# Altium PCB MIFA.PcbDoc (part 3 of 5)
Units mm, origin at the board's own origin, x right, y up, seen from the top; angles counter-clockwise.
Board outline 61 x 65 mm, 6 copper layers (Top Layer, Mid-Layer 1, Mid-Layer 2, Mid-Layer 3, Mid-Layer 4, Bottom Layer), stack 1.538 mm thick; 269 components, 171 nets, 1183 pads, 797 vias.
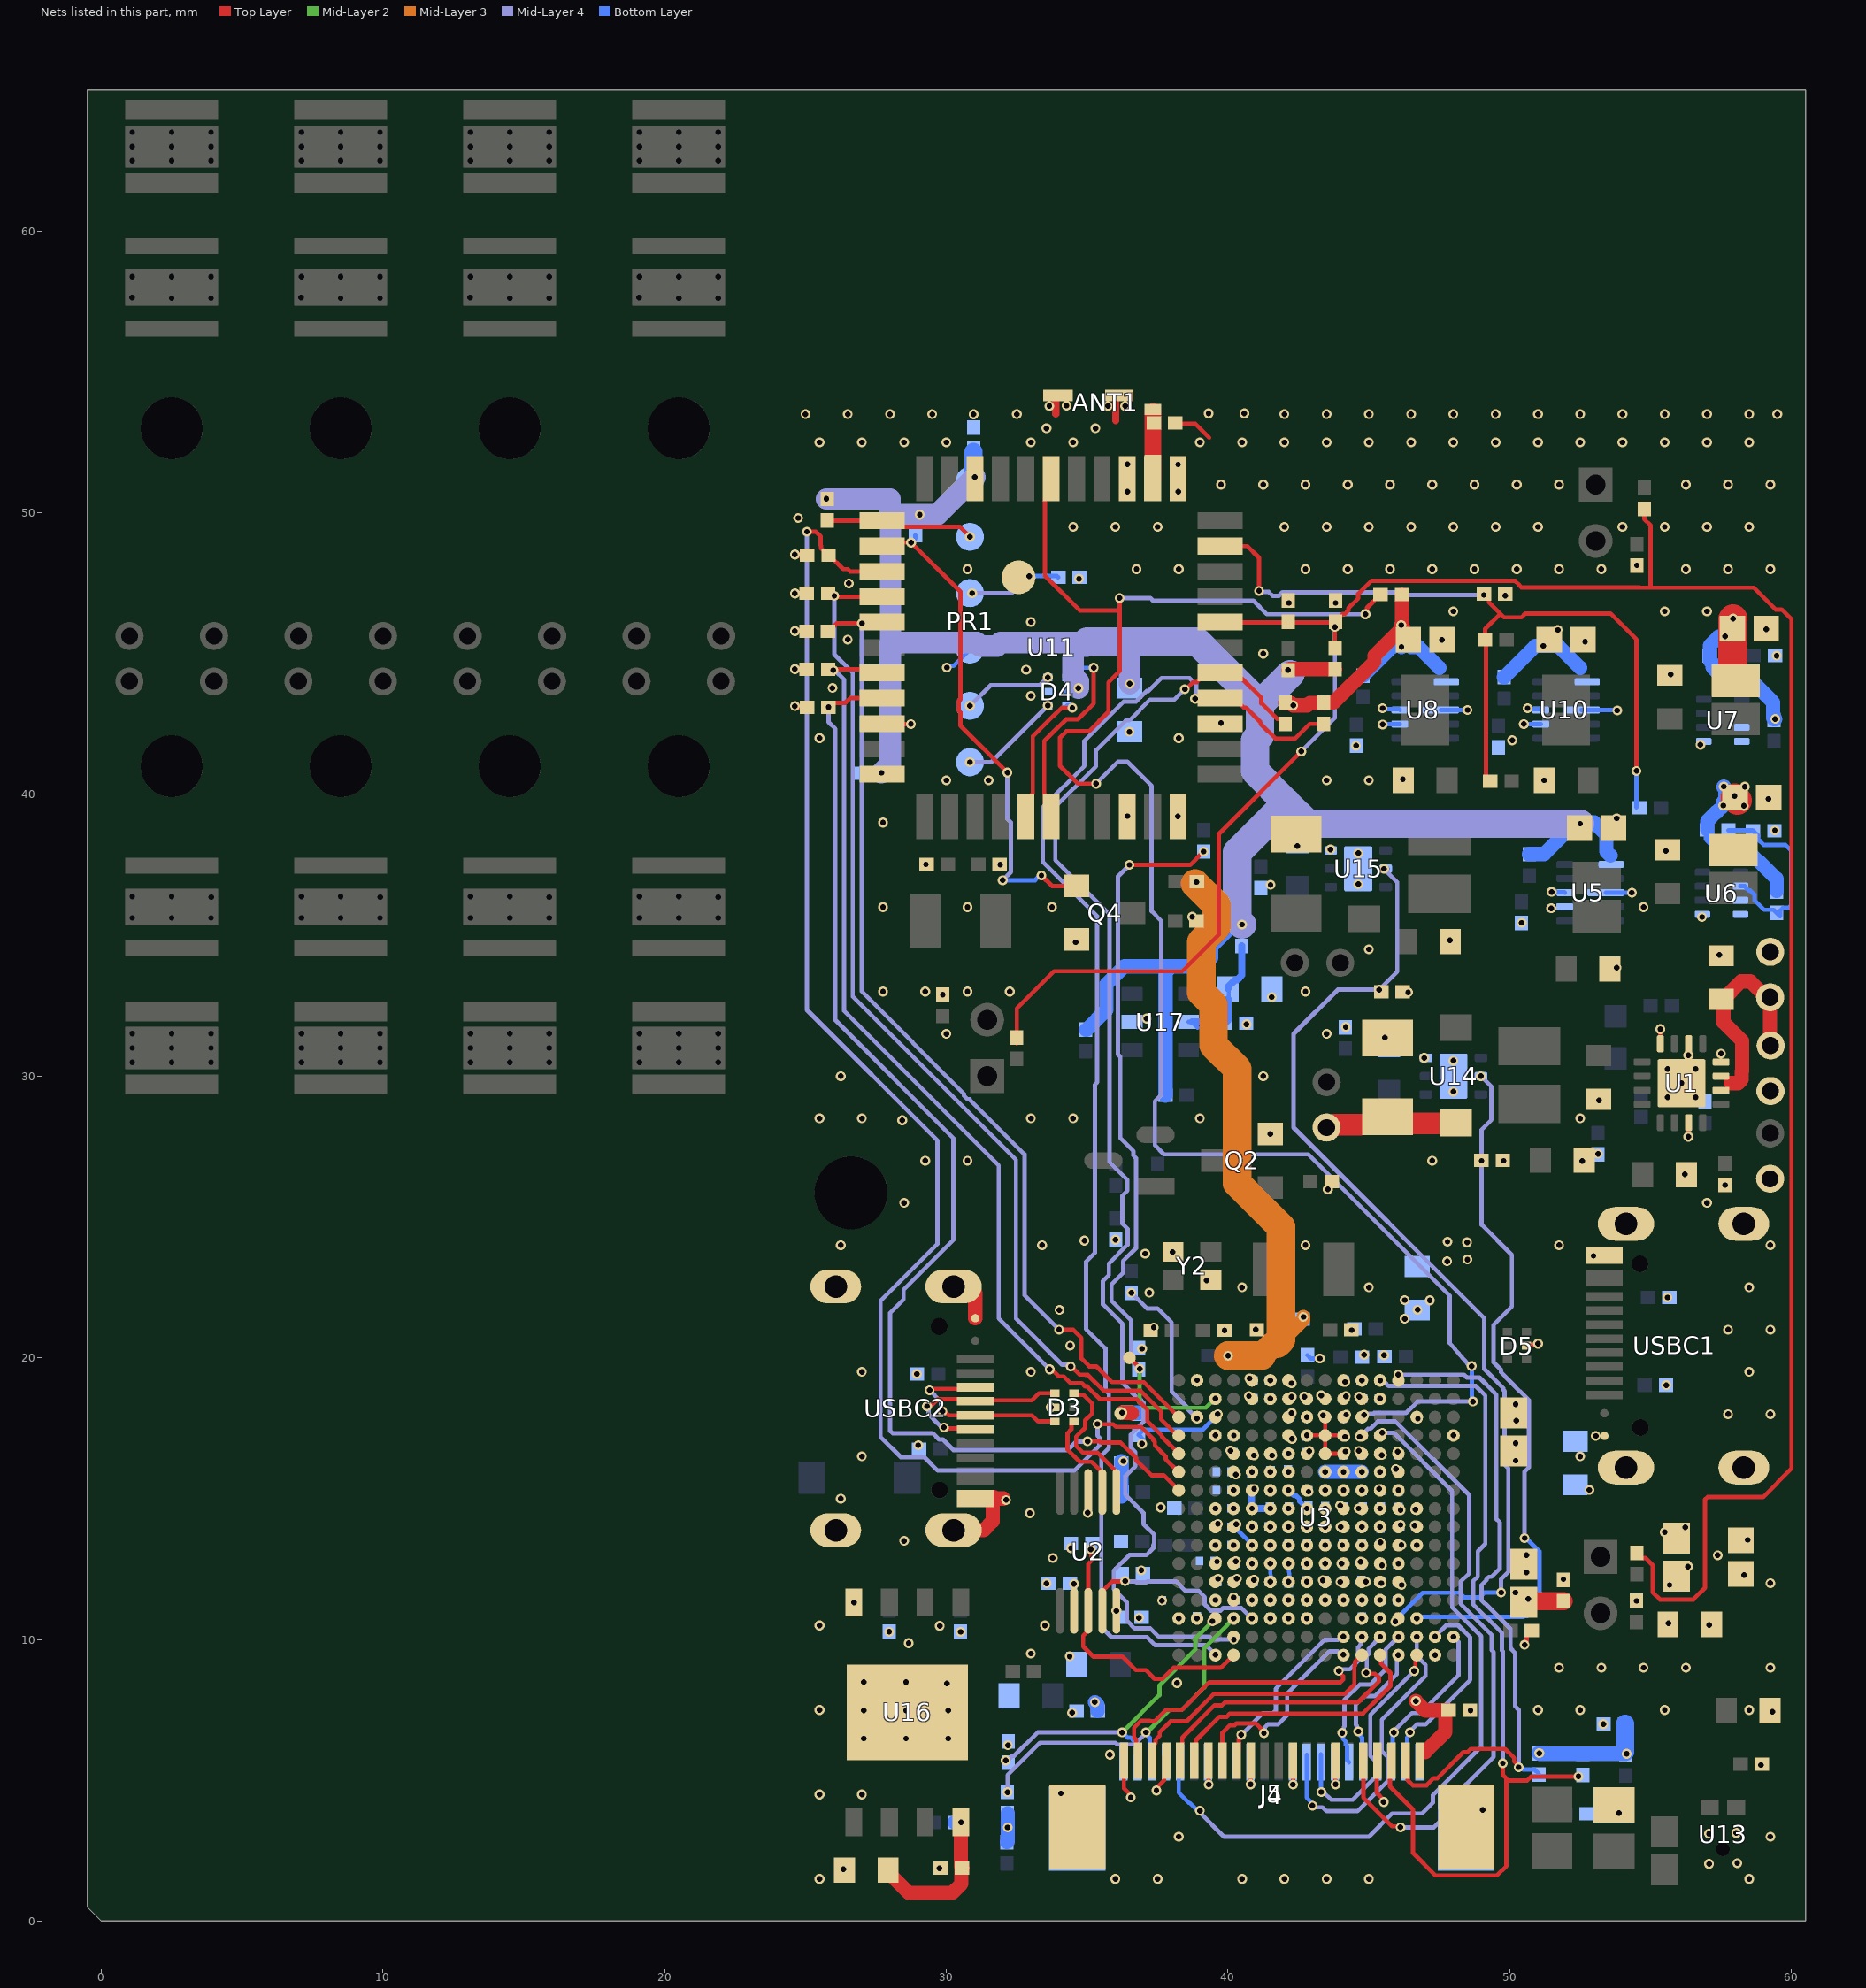
[diagram p6: the nets of this part, all layers, seen from the top]

## Part data (continued)
R22 R50: library part CMP-03412-016018-1, "C49655223", Case/Package=0402, Max Operating Temperature=155°C, Max Power Dissipation=63mW, Min Operating Temperature=-55°C, Ratings=AEC-Q200, Resistance=511kOhm, Resistor Type="Thick Film", Temperature Coefficient=100ppm/°C, Tolerance=1%, Features="Moisture Resistant", Height=0.015inch, Length=0.039inch, Number of Terminations=2, Packaging="Tape and Reel", RoHS Compliant=Yes, Series=AC, Width=0.02inch
R24 R55: library part CMP-03412-016018-1, "C54920709", Case/Package=0402, Max Operating Temperature=155°C, Max Power Dissipation=63mW, Min Operating Temperature=-55°C, Ratings=AEC-Q200, Resistance=91kOhm, Resistor Type="Thick Film", Temperature Coefficient=100ppm/°C, Tolerance=1%, Features="Moisture Resistant", Height=0.015inch, Length=0.039inch, Number of Terminations=2, Packaging="Tape and Reel", RoHS Compliant=Yes, Series=AC, Width=0.02inch
R25: library part CMP-03412-016018-1, "C25779", Case/Package=0402, Max Operating Temperature=155°C, Max Power Dissipation=63mW, Min Operating Temperature=-55°C, Ratings=AEC-Q200, Resistance=33kOhm, Resistor Type="Thick Film", Temperature Coefficient=100ppm/°C, Tolerance=1%, Features="Moisture Resistant", Height=0.015inch, Length=0.039inch, Number of Terminations=2, Packaging="Tape and Reel", RoHS Compliant=Yes, Series=AC, Width=0.02inch
R29: library part CMP-03412-016018-1, "C25750", Case/Package=0402, Max Operating Temperature=155°C, Max Power Dissipation=63mW, Min Operating Temperature=-55°C, Ratings=AEC-Q200, Resistance=120kOhm, Resistor Type="Thick Film", Temperature Coefficient=100ppm/°C, Tolerance=1%, Features="Moisture Resistant", Height=0.015inch, Length=0.039inch, Number of Terminations=2, Packaging="Tape and Reel", RoHS Compliant=Yes, Series=AC, Width=0.02inch
R33 R46 R47 R48 R52: library part CMP-03412-016018-1, "C324768", Case/Package=0402, Max Operating Temperature=155°C, Max Power Dissipation=63mW, Min Operating Temperature=-55°C, Ratings=AEC-Q200, Resistance=240Ohm, Resistor Type="Thick Film", Temperature Coefficient=100ppm/°C, Tolerance=1%, Features="Moisture Resistant", Height=0.015inch, Length=0.039inch, Number of Terminations=2, Packaging="Tape and Reel", RoHS Compliant=Yes, Series=AC, Width=0.02inch
R37 R62: library part CMP-03412-016018-1, "C25087", Case/Package=0402, Max Operating Temperature=155°C, Max Power Dissipation=63mW, Min Operating Temperature=-55°C, Ratings=AEC-Q200, Resistance=200Ohm, Resistor Type="Thick Film", Temperature Coefficient=100ppm/°C, Tolerance=1%, Features="Moisture Resistant", Height=0.015inch, Length=0.039inch, Number of Terminations=2, Packaging="Tape and Reel", RoHS Compliant=Yes, Series=AC, Width=0.02inch
R42 R54: library part CMP-03412-016018-1, "C25092", Case/Package=0402, Max Operating Temperature=155°C, Max Power Dissipation=63mW, Min Operating Temperature=-55°C, Ratings=AEC-Q200, Resistance=22Ohm, Resistor Type="Thick Film", Temperature Coefficient=100ppm/°C, Tolerance=1%, Features="Moisture Resistant", Height=0.015inch, Length=0.039inch, Number of Terminations=2, Packaging="Tape and Reel", RoHS Compliant=Yes, Series=AC, Width=0.02inch
R56: library part CMP-03412-016018-1, "C25794", Case/Package=0402, Max Operating Temperature=155°C, Max Power Dissipation=63mW, Min Operating Temperature=-55°C, Ratings=AEC-Q200, Resistance=51kOhm, Resistor Type="Thick Film", Temperature Coefficient=100ppm/°C, Tolerance=1%, Features="Moisture Resistant", Height=0.015inch, Length=0.039inch, Number of Terminations=2, Packaging="Tape and Reel", RoHS Compliant=Yes, Series=AC, Width=0.02inch
R59: library part CMP-03412-016018-1, "C25764", Case/Package=0402, Max Operating Temperature=155°C, Max Power Dissipation=63mW, Min Operating Temperature=-55°C, Ratings=AEC-Q200, Resistance=200kOhm, Resistor Type="Thick Film", Temperature Coefficient=100ppm/°C, Tolerance=1%, Features="Moisture Resistant", Height=0.015inch, Length=0.039inch, Number of Terminations=2, Packaging="Tape and Reel", RoHS Compliant=Yes, Series=AC, Width=0.02inch
R63: library part CMP-03412-016018-1, "C49653548", Case/Package=0402, Max Operating Temperature=155°C, Max Power Dissipation=63mW, Min Operating Temperature=-55°C, Ratings=AEC-Q200, Resistance=30kOhm, Resistor Type="Thick Film", Temperature Coefficient=100ppm/°C, Tolerance=1%, Features="Moisture Resistant", Height=0.015inch, Length=0.039inch, Number of Terminations=2, Packaging="Tape and Reel", RoHS Compliant=Yes, Series=AC, Width=0.02inch
R66: library part CMP-03412-016018-1, "C23157", Manufacturer=Yageo, Manufacturer Part Number=SR0603FR-7T10RL, Package=SR0603, Power Rating=0.25W, Resistance=3Ohm, Temperature="-55°C to +155°C", Temperature Range High=+155°C, Temperature Range Low=-55°C, Tolerance=0.01, Voltage Rating=75V, Automotive=Yes, Automotive Grade="Grade 0", Category=Res, ComponentLink2Description=Datasheet, ComponentLink2URL=http://www.yageo.com/documents/recent/PYu-SR_D_F%20tol_RoHS_L_3.pdf, Composition="Thick Film", Device Class L1="Passive Components", Device Class L2=Resistors, Device Class L3="Chip SMD Resistors", Digikey Description="RES SMD 0603 1/10W 1% 3 OHM", Footprint Url=http://www.yageo.com/exep/pages/download/literatures/PYu-R_Mount_10.pdf, Height=0.55mm, Ipc Land Pattern Name=RESC16080X45, Lead Free=Yes, Octopart=https://octopart.com/sr0603fr-7t10rl-yageo-91478074, RoHS=TRUE, Series=SR
R68: library part CMP-03412-016018-1, "C22769", Manufacturer=Yageo, Manufacturer Part Number=SR0603FR-7T10RL, Package=SR0603, Power Rating=0.25W, Resistance=1.5Ohm, Temperature="-55°C to +155°C", Temperature Range High=+155°C, Temperature Range Low=-55°C, Tolerance=0.01, Voltage Rating=75V, Automotive=Yes, Automotive Grade="Grade 0", Category=Res, ComponentLink2Description=Datasheet, ComponentLink2URL=http://www.yageo.com/documents/recent/PYu-SR_D_F%20tol_RoHS_L_3.pdf, Composition="Thick Film", Device Class L1="Passive Components", Device Class L2=Resistors, Device Class L3="Chip SMD Resistors", Digikey Description="RES SMD 0603 1/10W 1% 1.5 OHM", Footprint Url=http://www.yageo.com/exep/pages/download/literatures/PYu-R_Mount_10.pdf, Height=0.55mm, Ipc Land Pattern Name=RESC16080X45, Lead Free=Yes, Octopart=https://octopart.com/sr0603fr-7t10rl-yageo-91478074, RoHS=TRUE, Series=SR
R69: library part CMP-03412-016018-1, "C25765", Case/Package=0402, Max Operating Temperature=155°C, Max Power Dissipation=63mW, Min Operating Temperature=-55°C, Ratings=AEC-Q200, Resistance=20kOhm, Resistor Type="Thick Film", Temperature Coefficient=100ppm/°C, Tolerance=1%, Features="Moisture Resistant", Height=0.015inch, Length=0.039inch, Number of Terminations=2, Packaging="Tape and Reel", RoHS Compliant=Yes, Series=AC, Width=0.02inch
R71 R72: library part CMP-03412-016018-1, "C26083", Case/Package=0402, Max Operating Temperature=155°C, Max Power Dissipation=63mW, Min Operating Temperature=-55°C, Ratings=AEC-Q200, Resistance=1MOhm, Resistor Type="Thick Film", Temperature Coefficient=100ppm/°C, Tolerance=1%, Features="Moisture Resistant", Height=0.015inch, Length=0.039inch, Number of Terminations=2, Packaging="Tape and Reel", RoHS Compliant=Yes, Series=AC, Width=0.02inch
RBT1: library part CMP-03412-016018-1, "C25744", Case/Package=0402, Max Operating Temperature=155°C, Max Power Dissipation=63mW, Min Operating Temperature=-55°C, Ratings=AEC-Q200, Resistance=768kR, Resistor Type="Thick Film", Temperature Coefficient=100ppm/°C, Tolerance=1%, Features="Moisture Resistant", Height=0.015inch, Length=0.039inch, Number of Terminations=2, Packaging="Tape and Reel", RoHS Compliant=Yes, Series=AC, Width=0.02inch
S1 S2 S3: library part CMP-1755-00004-1, "C157932", Capacitance="10 uF", Case\Package=Radial, Max Operating Temperature="85 degC", Min Operating Temperature="-40 degC", Package Quantity=200, Tolerance=20%, Voltage Rating="50 V", ComponentLink1Description=Datasheet, ComponentLink1URL=http://www.jst-mfg.com/product/pdf/eng/ePH.pdf, DatasheetVersion=Dec-12, Diameter="5 mm", Height="11 mm", Lead Pitch="2 mm", Length="11 mm", Mount="Through Hole", PackageDescription="Male Header, Pitch 2 mm, 1 x 2 Position, Height 4.8 mm, Tail Length 3.4 mm", PackageReference=S2B-PH-K-S, Packaging=Bulk, Pins=2, Radiation Hardening=No, REACH SVHC="No SVHC", RoHSCompliant=true, Voltage Rating (DC)="50 V"
U1: library part CMP-0321-00268-2, "C129319", Manufacturer="Texas Instruments", Over Voltage Protection=N, Code_JEDEC=MO-220, ComponentLink1Description=Datasheet, ComponentLink1URL=http://www.ti.com/general/docs/lit/getliterature.tsp?genericPartNumber=BQ24072T&fileType=pdf, DatasheetVersion=SLUS937A, Eco-Plan="Green (RoHS & no Sb/Br)", Lead Acid=N, Li-Ion=Y, Li-Polymer=Y, Mounting Technology="Surface Mount", NiCd=N, NiMH=N, PackageDescription="16-Pin Plastic Quad Flat No-Lead, 3 x 3 mm Body, 0.5 mm Pitch, 1.7 x 1.7 mm Exposed Pad", PackageReference=RGT0016C, PackageVersion="revH, Oct-2011", PartNumber=BQ24072TRGTR, SubFamily="Battery Charge Management", Vin(Min)(V)=4.3
U2: "C3035748", Current - Supply=-, JLCPCB Part Class="Extended Part", LCSC Part Name=CH340X, Manufacturer=WCH(南京沁恒), Operating Temperature=-20℃~+70℃, Voltage - Supply=3.3V；5V, AddInBom=yes, Applications Function="USB to serial；USB to Parallel", ConvertToPcb=yes, Data Rate=2Mbps, Datasheet=https://item.szlcsc.com/datasheet/CH340X/3584030.html, FootprintName=MSOP-10_L3.0-W3.0-P0.50-LS5.0-BL, Manufacturer Part=CH340X, ModelId=875cf331c88d40d1aea94374997f39b1, ModelName=MSOP-10_L3.0-W3.0-H1.1-LS5.0-P0.50, ModelTransform=118.11,196.85,0,0,0,0,0,0,0, Number Of Channels=-, Quiescent Supply Current=-, Supplier=LCSC, Supplier Footprint=MSOP-10, Supplier Part=C3035748, Symbol=CH340X, USB Protocol="USB 2.0"
U3: "C42414902", JLCPCB Part Class="Extended Part", LCSC Part Name=K230平台及其特性, Manufacturer=Canaan(嘉楠), ManufacturerPart=K230D, AddInBom=yes, ConvertToPcb=yes, Datasheet=https://item.szlcsc.com/datasheet/K230D/44408979.html, Features="Calendar function；Power-on reset (POR)；True random number generator (TRNG)；Watchdog reset；Built-in general-purpose timer；Hardware CRC；Software reset", FootprintName=BGA-256_L11.0-W11.0-P0.65-BL, ModelId=5e2811f3a7254058be5ff42f0a018083, ModelName=BGA-256_L11.0-W11.0-P0.65-BL, ModelTransform=433.07,433.07,0,90,0,0,0,0,0, Supplier=LCSC, Supplier Footprint=BGA-256, SupplierPart=C42414902, Symbol=K230D
U5 U8 U10: library part CMP-04918-000005-1, "C2845237", Manufacturer="Texas Instruments", Max Junction Temp=+125°C, Max Supply Voltage=5.5V, Min Supply Voltage=1.3V, Nominal Supply Current=11uA, Output Current=2A, Output Voltage=1.8-5.2V, Package=DLA0010A, Switching Frequency=1.4/1.6/2.1MHz, Temperature="-40°C to +125°C", Temperature Range Low=-40°C, Automotive=No, Category=IC, ComponentLink2Description=Datasheet, ComponentLink2URL=https://www.ti.com/lit/ds/symlink/tps63802.pdf, Device Class L1="Integrated Circuits (ICs)", Device Class L2="Power Management ICs", Device Class L3="Voltage Regulators - Switching", Digikey Description="IC POWER MANAGEMENT", Height=1mm, Lead Free=Yes, Manufacturer Part Number=TPS63802DLAR, Max Duty Cycle=100%, Mouser Description="2-A, high-efficient, 11-µA quiescent current buck-boost converter in QFN/DFN package 10-VSON-HR -40 to 125", Number Of Outputs=1, Octopart=https://octopart.com/tps63802dlar-texas+instruments-97359678, Output Type=AdjustableProgrammable, RoHS=TRUE, Standoff Height=0mm, Switching Topology=Buck-Boost, Temperature Range High=+125°C
U6 U7: library part CMP-04918-000715-1, "C2693497", Max Input Voltage=5.5V, Max Operating Temperature=125°C, Max Output Voltage=4V, Min Input Voltage=2.4V, Min Operating Temperature=-40°C, Min Output Voltage=600mV, Output Current=3A, Switching Frequency=2.2MHz, Mount="Surface Mount", Number Of Outputs=1, Number of Pins=8, Output Configuration=Positive, Output Type=Adjustable, Packaging="Cut Tape", RoHS Compliant=Yes, Series=-, Synchronous Rectifier=Yes
U11: "C41368035", JLCPCB Part Class="Extended Part", LCSC Part Name=Wi-Fi6+BLE5.3模组, Manufacturer=Ai-Thinker(安信可), ManufacturerPart=Ai-M62-CBS(BLIFN4), Operating Temperature=-40℃~+85℃, Output Power=22dBm, Receive  Current=59mA, Send  Current=394mA, Voltage - Supply=2.97V~3.6V, AddInBom=yes, ConvertToPcb=yes, Datasheet=https://item.szlcsc.com/datasheet/Ai-M62-CBS(BLIFN4)/43122706.html, FootprintName=WIRELM-SMD_AI-M62-CBS, Interface Type=I2C；GPIO；UART；USB2.0；SPI；PWM；SDIO；I2S, ModelId=220c4423d0fa4477abd1b31893269491, ModelName=WIRELM-SMD_AI-M62-CBS, ModelTransform=472.44,472.44,0,0,0,0,0.001,0.005,0, Sensitivity=-98dBm, Supplier=LCSC, Supplier Footprint=SMD,12x12mm, SupplierPart=C41368035, SymbolName=AI-M62-CBS(BLIFN4), Utilized IC / Part=BL616
U13: "C51928208", Current Consumption=175uA, JLCPCB Part Class="Extended Part", LCSC Part Name="3.6V -38dB", Manufacturer=MEMS(敏芯微), ManufacturerPart=MSM381ACB026, Voltage - Supply=3.6V, AddInBom=yes, ConvertToPcb=yes, Datasheet=https://item.szlcsc.com/datasheet/MSM381ACB026/54640763.html, Direction=Omnidirectional, Features="Omnidirectional pickup", FootprintName=MIC-SMD_L2.8-W1.9_MSM381ACB026, Height=0.9mm, Impedance=170Ω, Length=2.75mm, Output Type="Analog output", S/N Ratio=64dB, Sensitivity=-38dB, Supplier=LCSC, Supplier Footprint=LGA-3(1.9x2.8), SupplierPart=C51928208, Symbol=MSM381ACB026, Width=1.85mm
U14 U15: library part TI-TPS6116XDRV6-1600X1000TP, "C324075", Manufacturer="Texas Instruments", Rating=Catalog, Switching Frequency(Max)(kHz)=600, ComponentLink1Description="Manufacturer URL", ComponentLink1URL=http://www.ti.com/, ComponentLink2Description=Datasheet, ComponentLink2URL=http://www.ti.com/general/docs/lit/getliterature.tsp?genericPartNumber=TPS61160A&fileType=pdf, ComponentLink3Description="Package Specification", ComponentLink3URL=http://www.ti.com/litv/pdf/mpds216d, DatasheetVersion=SLVS937A, Dimming=TRUE, Eco-Plan="Green (RoHS & no Sb/Br)", Iq(Typ)(mA)=1.5, Mounting Technology="Surface Mount", PackageDescription="6-Pin Plastic Small Outline No-Lead, Body 2 x 2 mm, Pitch 0.65 mm", PackageReference=DRV0006A, PackageVersion=4206925/E, PartNumber=TPS61161DRVR, SubFamily="White LED Driver", Synchronous Rectification=TRUE, Topology=Boost, Vin(Max)(V)=18, Vin(Min)(V)=2.7
U16: "C17626844", Clock Frequency=104MHz, JLCPCB Part Class="Extended Part", LCSC Part Name="支持双路/四路SPI、缓冲读取和顺序读取的SPI NAND闪存", Manufacturer=Winbond(华邦), ManufacturerPart=W25N02KVZEIR, Operating Temperature=-40℃~+85℃, Standby Supply Current=10uA, Voltage - Supply=2.7V~3.6V, AddInBom=yes, Block Erase Time(tBE)=2ms, ConvertToPcb=yes, Data Retention - TDR (Year)="10 Years", Datasheet=https://item.szlcsc.com/datasheet/W25N02KVZEIR/3508597.html, FootprintName=WSON-8_L8.0-W6.0-P1.27-TL-EP-1, Interface=SPI, Memory Size=2Gbit, ModelId=9e5cc5bccb2d4d2ba04b587249e4c285, ModelName=WSON-8_L8.0-W6.0-P1.27-TL-EP-1, ModelTransform=314.96,236.22,0,0,0,0,0,0,0, Page Program time (TPP)=700us, Program / Erase Cycles="60,000 Cycles", Supplier=LCSC, Supplier Footprint=WSON-8-EP(6x8), SupplierPart=C3010298, Symbol=W25N02KVZEIR, Write Cycle Time(tWC)=-
U17: library part aht30_c45354925, "C2757850", Current - Supply=570uA, Humidity Tolerance=±3%RH, JLCPCB Part Class="Extended Part", LCSC Part Name=温湿度传感器, Manufacturer=广州奥松, ManufacturerPart=AHT30, Temperature Range=-40℃~+120℃, Temperature Tolerance=±0.5℃, Voltage - Supply=2.2V~5.5V, AddInBom=yes, ConvertToPcb=yes, Datasheet=https://item.szlcsc.com/datasheet/AHT30/47444209.html, Features="Factory calibration", FootprintName=MIC-SMD_6P-L3.0-W3.0-P1.00-TL, Humidity=0%RH~100%RH, Interface=I2C, ModelId=157746d41b2d4f19849b880ea67ac3ea, ModelName=MIC-SMD_6P-L3.0-W3.0-P1.00-TL, ModelTransform=118.11,118.11,0,0,0,0,0.006,-0.001,0, Resolution=-, Supplier=LCSC, Supplier Footprint=SMD-6P,3x3mm, SupplierPart=C45354925, Symbol=AHT30_C45354925
USBC1 USBC2: "C165948", Current Rating-Power=5A, JLCPCB Part Class="Extended Part", LCSC Part Name="Type-C 母 卧贴", Manufacturer=韩国韩荣, ManufacturerPart=TYPE-C-31-M-12, Operating Temperature=-30℃~+80℃, Voltage Rating=20V, AddInBom=yes, Connect-Disconnect Life="10,000 cycles", Connector Type=Type-C, ConvertToPcb=yes, Datasheet=https://item.szlcsc.com/datasheet/TYPE-C-31-M-12/177331.html, FootprintName=USB-C_SMD-TYPE-C-31-M-12_1, Gender=Female, Length=7.35mm, ModelId=8421221a464047838322348b3a9debc3, ModelName=USB-C_SMD-TYPE-C-31-M-12_1, ModelTransform=351.9678,311.023,0,180,0,0,0,-43.307,-33.465, Mounting Type="Surface Mount, Right Angle", Number of Contacts=16P, Number of Ports=1, Protocol Standard=-, Supplier=LCSC, Supplier Footprint=SMD, SupplierPart=C165948, Symbol=TYPE-C-31-M-12
Y1 Y3: library part CMP-0447-00001-4, "C32346", Case/Package=CSMD, ESR (Equivalent Series Resistance)=70kR, Frequency=32.768kHz, Frequency Tolerance=20ppm, Load Capacitance=12.5pF, Max Operating Temperature=85°C, Min Operating Temperature=-40°C, Operating Frequency="32.768 kHz", Package Quantity=3000, Depth=1.5mm, Height=0.9mm, Lead Free="Lead Free", Length=3.2mm, Number of Pins=2, Packaging="Tape and Reel", Radiation Hardening=No, REACH SVHC="No SVHC", RoHS Compliant=Yes, Series=ABS07, Series Resistance=70kR, Termination=SMD/SMT, Tolerance=20ppm, Width=1.5mm
Y2: library part CMP-06054-000017-1, "C2965580", Case/Package=SMD/SMT, ESR (Equivalent Series Resistance)=150R, Frequency=24MHz, Frequency Stability=40ppm, Frequency Tolerance=30ppm, Load Capacitance=6pF, Max Operating Temperature=85°C, Min Operating Temperature=-30°C, Operating Frequency="24 MHz", Package Quantity=1, Depth=1.6mm, Height=0.028inch, Lead Free="Lead Free", Length=2mm, Mount="Surface Mount", Number of Pins=4, Packaging="Tape and Reel", REACH SVHC="No SVHC", RoHS Compliant=Yes, Series=XRCGB, Series Resistance=150R, Termination=SMD/SMT, Tolerance=30ppm, Width=1.6mm

## Free pads (board coordinates)
  rect 0.599x1.6 smd mask+0.05: GND1(37.331,51.255)
  round 2.2 hole 2.2 unplated: HOLE(2.5,41) HOLE(2.5,53) HOLE(8.5,41) HOLE(8.5,53) HOLE(14.5,41) HOLE(14.5,53) HOLE(20.5,41) HOLE(20.5,53)
  round 2.6 hole 2.6 unplated: HOLE(26.615,25.858)

## Via types
v1: diameter 0.35, hole 0.2, Top Layer to Bottom Layer, tented both sides, 788 vias
v2: diameter 0.35, hole 0.2, Top Layer to Bottom Layer, 9 vias

## Nets (pads, with @x,y where several pads share a name; then routed paths per layer and width w, separated by ;. In a path a pad name is that pad's centre, name@x,y a point inside that pad or via, vN(x,y) a via of type N, cw(c..) or ccw(c..) an arc to the next point about the centre after c; other vN are vias at no path point)
0V8: C17.1 C18.1 C21.1 C38.1 C58.1 C63.1 C65.1 C66.1 C67.1 C68.1 C69.1 C70.1 C71.1 C72.1 C73.1 C74.1 C75.1 C76.1 C77.1 C78.1 C79.1 C80.1 C81.1 C82.1 C84.1 C85.1 FB3.1 L1.2 R25.2 U3.D8 U3.E6 U3.E7 U3.E9 U3.E10 U3.F5 U3.F6 U3.F7 U3.F9 U3.G5 U3.G6 U3.G7 U3.G9 U3.H6 U3.H8 U3.H10 U3.J6 U3.J8 U3.J10 U3.K6 U3.K8 U3.K10 U3.L6 U3.L8 U3.L10 U3.M8 U3.M10 | length 9.7
  Top Layer w1.016: C18.1@57.985,39.887 C18.1@58.084,39.789
  Bottom Layer w0.152: C82.1@40.104,14.004 40.157,14.057 40.254,14.057 v1(40.292,14.095) 40.33,14.057 40.33,13.895 40.856,13.369 v1@40.868,13.369 ; v1@41.502,12.548 C63.1@41.516,12.073 ; v1(42.148,12.7) v1@42.159,12.697 ; v1@42.159,12.7 v1@42.159,12.697 ; C67.1@42.178,12.05 v1@42.159,12.697 ; v1@42.232,12.683 v1@42.159,12.697 ; C66.1@42.706,12.697 C66.1@42.778,12.699
  Bottom Layer w0.254: v1(40.929,15.348) 40.91,15.367 C65.1@40.826,15.367 40.838,15.355 40.838,14.662 v1(40.85,14.65) v1(41.5,14.65)
  Bottom Layer w0.381: R25.2@57.004,38.736 57.026,38.736 57.071,38.69 57.071,38.45 57.473,38.049 57.976,38.049
  Bottom Layer w0.508: R25.2@57.008,38.754 57.008,39.048 57.336,39.376 57.352,39.376 v1(57.58,39.604) 57.58,39.734 57.66,39.814 57.66,40.192 57.599,40.253 v1(57.599,40.28) ; 57.976,38.049 58.17,38.049 58.192,38.027 58.407,38.027 58.711,37.723 58.85,37.625 59.471,37.004 C21.1@59.471,36.575
  other v1: 41.5,12.049 42.148,12.049 44.024,12.695 40.85,12.7 41.5,12.7 42.798,12.7 43.448,12.7 44.706,12.759 40.85,13.35 41.5,13.35 42.148,13.35 58.44,13.536 55.502,13.813 56.229,13.979 42.798,14 43.448,14 44,14 44.749,14 45.399,14 42.148,14.65 42.858,15.247 43.448,15.3 44.098,15.3 44.749,15.3 52.828,15.312 45.368,15.346 58.311,39.595 57.981,39.949 58.345,40.275
0V8_MIPI: C28.1 C31.1 C41.1 FB3.2 U3.M4 U3.N5
  other v1: 55.63,10.576 45.399,11.399 46.161,11.934 55.672,11.933 56.328,12.592
1V1: C20.1 C22.1 C39.1 C40.1 C42.1 C45.1 C46.1 C47.1 C48.1 C49.1 C59.1 L2.2 R26.2 R33.1 R47.2 U3.F11 U3.F15 U3.F16 U3.G11 U3.J11 U3.K11 U3.L11 U3.L16 U3.M15 | length 9
  Top Layer w1.016: L2.2@57.907,44.1 57.907,46.218 v1(57.928,46.239)
  Bottom Layer w0.508: v1(43.448,15.951) v1(44.098,15.951) v1(44.749,15.951) ; R26.2@57.098,44.918 57.098,45.283 57.41,45.595 57.631,45.595 v1(57.648,45.612) 57.648,45.629 57.928,45.91 v1(57.928,46.239) ; R26.2@57.098,44.92 57.098,44.906 57.102,44.902 57.102,44.757 57.194,44.665 57.194,44.517 57.549,44.161 58.454,44.161 59.348,43.267 59.348,42.715 59.384,42.678 v1(59.425,42.678)
  other v1: 41.5,15.951 42.148,15.951 41.5,18.549 45.399,18.549 41.5,19.199 44.749,19.199 44.828,20.107 45.535,20.095 46.27,21.384 46.727,21.707 47.162,22.04 46.27,22.046
1V8: B1_P.1 C12.1 C13.1 C44.1 C53.1 C54.1 C55.1 C56.1 C57.1 C89.1 FB1.1 FB2.1 R6.2 R20.1 R30.1 R45.2 R53.2 R56.2 R64.2 RD1.1 U3.C6 U3.D4 U3.D5 U3.D10 U3.D11 U3.D12 U3.E8 U3.H14 U10.6 | length 28.3
  Top Layer w0.508: v1(36.244,18.049) 36.564,18.049 36.583,18.03
  Top Layer w0.65: FB1.1@50.458,11.358 50.568,11.358 v1(50.653,11.443) FB1.1@50.653,11.359 ; FB1.1@50.654,11.358 RD1.1@51.907,11.358
  Mid-Layer 3 w0.508: 41.879,20.681 41.989,20.681 42.674,21.366 v1(42.674,21.452)
  Mid-Layer 3 w0.9: 41.185,20.075 41.61,20.5
  Mid-Layer 3 w1.016: v1@38.831,36.837 39.588,36.08 39.588,35.301 39.05,34.763 39.05,32.972 39.481,32.541 39.481,31.1 40.325,30.255 40.325,26.196 41.879,24.642 41.879,20.681 ; v1(40,20.075) 41.185,20.075 ; 41.738,20.5 41.879,20.641
  Bottom Layer w0.508: R53.2@36.219,15.084 R53.2@36.219,15.231 R20.1@36.219,16.332 ; v1(36.244,18.049) R64.2@36.831,18.049 ; R56.2@49.788,44.166 49.802,44.166 50.909,45.273 v1(51.189,45.273) 51.727,45.273 52.5,44.5
  other v1: 40.2,11.496 50.196,11.67 40.311,12.158 39.609,12.768 40.85,14 40.2,15.3 40.274,15.856 36.282,16.332 40.088,16.707 50.236,17.77 42.798,17.899 50.208,18.351 47.778,23.427 48.499,23.489 48.486,24.098 47.79,24.123 38.884,36.89 51.704,45.839
1V8_DDR: C43.1 FB2.2 U3.H12
  other v1: 50.208,16.348 42.887,16.684 50.208,16.964
1V8_MIPI: C27.1 C30.1 FB1.2 U3.L4 U3.M6
  other v1: 44.749,11.402 50.599,12.382 45.466,12.635 50.599,12.999
3V3: C5.2 C6.1 C7.1 C8.1 C10.1 C25.1 C26.1 C29.1 C32.1 C51.1 C52.1 C86.1 C87.1 C93.1 C94.1 J4.22 J5.22 R2.1 R10.1 R13.2 R14.2 R15.2 R16.2 R17.2 R18.2 R32.2 R34.2 R36.2 R39.2 R40.2 R41.1 R43.1 R44.1 R50.2 R57.1 R60.2 R65.1 R70.1 RD2.1 U2.7 U2.10 U3.C7 U3.C9 U3.F4 U3.H4 U3.K4 U3.N8 U3.N10 U3.N11 U8.6 U16.8 | length 26.8
  Top Layer w0.2: v1@24.613,43.124 24.622,43.115 25.039,43.115 R70.1@25.059,43.095 ; v1@24.619,45.795 24.621,45.797 25.034,45.797 R57.1@25.036,45.795 ; v1@24.62,44.448 24.622,44.449 25.046,44.449 R65.1@25.047,44.448 ; v1(24.624,47.138) R44.1@25.048,47.138 ; v1(24.624,48.517) 24.605,48.498 R43.1@25.064,48.498
  Top Layer w0.508: C86.1@27.931,1.81 27.931,1.735 28.667,1 30.202,1 30.534,1.332 30.534,1.833 30.583,1.882 30.519,1.946 U16.8@30.519,3.513 30.525,3.513 v1(30.529,3.509) ; R36.2@42.025,43.257 42.029,43.254 42.223,43.254 v1(42.312,43.165) 42.815,43.165 42.904,43.254 43.392,43.254 43.403,43.265 43.745,43.265 45.202,44.722 45.202,44.93 C87.1@46.086,45.813 ; R32.2@46.176,47.092 46.176,46.043 v1(46.148,46.015) 46.201,45.962 46.201,45.699 C87.1@46.399,45.5 ; v1(46.668,7.815) 46.999,7.484 C8.1@47.807,7.484 ; 47,6 47.711,6.711 C8.1@47.711,7.388
  Bottom Layer w0.508: R41.1@30.303,3.51 R41.1@30.307,3.506 30.31,3.509 v1(30.529,3.509) ; R13.2@32.145,2.808 32.159,2.808 32.177,2.826 v1(32.177,3.329) R14.2@32.177,3.832 ; v1(35.27,7.775) 35.278,7.775 35.37,7.684 35.37,7.465 C7.1@35.373,7.461 ; R50.2@44.803,44.224 45.815,45.236 45.839,45.236 46.01,45.407 ; v1(46.158,45.236) v1@46.17,45.247 ; 46.17,45.563 46.326,45.407 46.329,45.407 46.5,45.236 46.764,45.236 47.5,44.5 ; R18.2@51.035,5.962 51.038,5.965 v1(51.05,5.965) ; R18.2@51.053,5.958 51.069,5.943 R17.2@52.599,5.943 54.093,5.943 R16.2@54.102,5.934
  Bottom Layer w0.65: R16.2@54.092,6.002 RD2.1@54.092,7.01
  other v1: 35.805,5.912 54.152,5.942 32.185,6.248 27.971,10.275 30.507,10.271 36.036,11.019 41.5,11.399 42.798,11.399 44.098,11.399 34.531,11.975 36.922,12.456 34.427,13.245 39.549,13.35 46.125,14.07 39.549,14.65 46.049,15.3 45.957,16.053 43.542,25.984 24.624,43.134 24.624,44.452 24.624,45.8
3V3_SLEEP: C14.1 C24.1 C88.1 C90.1 D4.5 PR1.6 R22.2 R23.1 R38.1 R52.1 R71.1 R73.1 R74.1 R76.2 U5.6 U11.9 U11.22 | length 73.7
  Top Layer w0.508: v1(42.133,44.414) 42.156,44.414 42.191,44.448 R71.1@43.805,44.448
  Mid-Layer 4 w0.762: v1(25.74,50.492) 28,50.492 28,50 28.02,49.98 ; v1(27.699,40.767) 28.01,41.078 28.01,45.392 28.02,45.392 ; v1(31.011,51.265) 29.677,49.931 v1(29.057,49.931) 28.069,49.931 28.02,49.98 ; 34.5,44.925 34.5,44.197 34.687,44.01 v1(34.687,43.775) ; 34.967,45.392 31.925,45.392 31.803,45.269 31.197,45.269 31.075,45.392 28.02,45.392 ; v1(36.51,43.929) 36.51,45.31 36.625,45.425 ; 28.02,45.392 28.02,49.98
  Mid-Layer 4 w1.016: 34.967,45.392 35,45.425 36.625,45.425 38.901,45.425 41.112,43.214 ; v1(40.494,35.381) 40.323,35.552 40.323,37.948 42.081,39.706 ; v1@42.206,44.271 41.13,43.196 41.13,42.099 40.958,41.926 40.958,40.829 42.081,39.706 ; v1(52.5,38.963) 42.823,38.963 42.081,39.706
  Bottom Layer w0.254: D4.5@34.276,43.656 34.284,43.664 34.523,43.664 34.634,43.775 v1(34.687,43.775)
  Bottom Layer w0.508: R74.1@34.955,31.642 34.969,31.642 35.678,32.351 35.678,33.259 36.319,33.899 37.776,33.899 38,33.899 ; R73.1@37.776,29.313 37.776,33.676 38,33.899 ; v1(40.494,35.381) 40.49,35.377 40.33,35.377 40.239,35.286 40.09,35.286 39.399,34.595 39.399,34.197 39.102,33.899 38,33.899 ; R22.2@50.685,37.882 50.688,37.886 51.22,37.886 52.298,38.963 v1(52.5,38.963) ; v1@52.5,39 53,39 53.424,38.576 53.424,37.981 53.578,37.827 53.579,37.827
  Bottom Layer w0.65: PR1.6@30.965,51.312 C88.1@30.965,52.165
AI_BOOT: PR1.4 R35.2 U11.45 | length 3.5
  Mid-Layer 4 w0.152: v1(30.918,47.146) 32.331,47.146 v1(32.937,47.751)
  Bottom Layer w0.152: PR1.4@30.838,47.146 PR1.4@30.997,47.146 ; v1(32.937,47.751) 33.929,47.751 R35.2@33.971,47.71
AI_D_N: D4.3 PR1.2 | length 3.2
  Mid-Layer 4 w0.152: v1(30.838,43.146) 31.569,43.876 33.31,43.876 33.59,44.156 v1(33.601,44.156)
AI_D_P: D4.1 PR1.1 | length 3.6
  Mid-Layer 4 w0.152: v1(30.838,41.146) 31.591,41.146 v1(33.601,43.156)
AI_EN: PR1.5 R38.2 U11.12 | length 5.3
  Top Layer w0.152: R38.2@25.77,49.728 25.78,49.718 U11.12@27.721,49.718 27.945,49.495 30.489,49.495 v1(30.838,49.146)
AI_RXD: R36.1 U3.D2 U11.38 | length 48.6
  Top Layer w0.152: v1(38.465,43.737) 38.519,43.737 38.772,43.991 38.892,43.991 39.22,44.318 U11.38@39.72,44.318 39.944,44.095 40.519,44.095 41.183,43.431 41.183,43.238 41.736,42.685 41.871,42.685 42.031,42.525 R36.1@42.031,42.504
  Mid-Layer 4 w0.152: v1(38.465,43.737) 38.095,43.368 37.235,43.368 36.5,42.633 36.376,42.633 35.31,41.567 35.31,40.998 33.733,39.421 33.733,38.642 33.868,38.507 33.868,37.669 35.789,35.748 35.789,26.96 36.431,26.318 36.431,25.936 36.252,25.758 36.252,24.766 36.432,24.586 36.432,24.289 36.432,24.016 35.767,23.35 35.767,22.935 35.56,22.728 35.56,21.895 36.252,21.202 36.252,19.105 36.825,18.532 36.879,18.532 36.998,18.413 36.998,17.728 36.541,17.271 36.541,16.821 36.709,16.653 36.709,16.155 36.348,15.794 36.348,15.146 37,14.494 37,14.103 37.373,13.73 37.373,13.389 37.342,13.358 37.342,13.239 37.246,13.143 37.103,13 36.5,13 35.944,12.444 35.944,11.788 36.413,11.319 36.413,10.664 36.683,10.393 37.245,10.393 37.533,10.105 39.329,10.105 39.437,9.998 v1(40.206,9.998)
AI_SD_CLK: R54.1 U3.B14 | length 5.7
  Mid-Layer 4 w0.152: v1(36.566,22.312) 37.125,21.753 37.498,21.753 38,21.251 38,18.803 38.588,18.215 38.588,18.156 v1(38.898,17.846)
AI_SD_CMD: R57.2 U3.A14 U11.16 | length 35.3
  Top Layer w0.152: R57.2@25.798,45.788 25.819,45.788 26.107,46.075 v1(27,46.075) ; v1(34,21) 34.5,21 34.795,20.705 34.795,20.38 34.791,20.376 34.791,19.978 35.072,19.697 35.32,19.697 35.883,19.134 37.013,19.134 37.246,18.902 U3.A14@38.249,17.899
  Mid-Layer 4 w0.152: v1(27,46.075) 27,33 30.624,29.376 30.624,29.306 30.756,29.174 30.826,29.174 32.774,27.226 32.774,22.226 v1(34,21)
AI_SD_D0: R65.2 U3.A12 U11.18 | length 35.9
  Top Layer w0.152: v1(25.986,44.411) R65.2@25.986,44.44 ; R65.2@25.987,44.441 27.599,44.441 U11.18@27.721,44.318 ; v1(33.668,19.593) 33.748,19.593 34,19.341 34.165,19.341 34.405,19.101 34.81,19.101 34.928,18.984 35.004,18.984 35.459,18.53 36.763,18.53 37.135,18.157 37.135,17.754 37.654,17.235 37.654,17.196 U3.A12@38.249,16.601
  Mid-Layer 4 w0.152: v1(25.986,44.411) 26.03,44.411 26.373,44.069 26.373,32.314 31.86,26.827 31.86,21.401 v1(33.668,19.593)
AI_SD_D1: R70.2 U3.A10 U11.19 | length 41.9
  Top Layer w0.152: R70.2@25.82,43.089 25.819,43.09 v1(25.819,43.095) 25.973,43.249 26.415,43.249 26.583,43.417 U11.19@27.721,43.417 ; v1(35.009,17.036) 35.442,17.036 35.489,16.988 36.194,16.988 36.735,16.447 36.735,16.376 37.276,15.835 37.714,15.835 U3.A10@38.249,15.3
  Mid-Layer 4 w0.152: v1(25.819,43.095) 25.819,42.568 26.058,42.329 26.058,31.99 30.254,27.793 30.254,24.186 28.484,22.416 28.484,22.072 28,21.588 28,17.415 28.089,17.325 29.516,17.325 29.739,17.102 29.874,17.102 30.253,16.724 34.303,16.724 34.606,17.026 35,17.026 v1(35.009,17.036)
AI_SD_D2: R43.2 U3.A11 U11.14 | length 51.5
  Top Layer w0.152: v1(25.05,49.325) 25.369,49.325 25.446,49.248 25.452,49.248 25.541,49.158 25.541,48.834 25.548,48.828 25.548,48.747 25.637,48.658 25.659,48.658 R43.2@25.825,48.492 ; R43.2@25.846,48.492 26.338,48 26.5,48 26.582,47.918 U11.14@27.721,47.918 ; v1(35.366,17.651) 35.371,17.645 35.927,17.645 36.022,17.55 36.911,17.55 37.348,17.113 37.348,17.074 37.401,17.021 37.401,16.889 37.785,16.505 37.785,16.408 38.242,15.951 U3.A11@38.249,15.951
  Mid-Layer 4 w0.152: v1(25.05,49.325) 25.05,32.351 29.687,27.713 29.687,24.046 27.667,22.026 27.667,17.187 28.381,16.473 29.219,16.473 29.692,16 34.541,16 35.432,16.891 35.432,17.171 35.366,17.238 v1(35.366,17.651)
AI_SD_D3: R44.2 U3.A13 U11.15 | length 37.8
  Top Layer w0.152: R44.2@25.925,47.018 U11.15@27.721,47.018 ; v1(34.415,19.694) 34.436,19.694 34.726,19.404 34.936,19.404 34.945,19.395 35.021,19.395 35.584,18.832 36.888,18.832 37.246,18.474 37.622,18.098 37.622,17.82 38.094,17.347 38.097,17.347 38.195,17.249 U3.A13@38.249,17.249
  Mid-Layer 4 w0.152: v1(26.025,47.05) 26.025,44.975 26.675,44.325 26.675,32.825 32.472,27.028 32.472,21.391 34.113,19.751 34.358,19.751 v1(34.415,19.694)
AI_TXD: R34.1 U3.C1 U11.37 | length 48
  Top Layer w0.152: U11.37@39.72,43.417 40.22,43.417 40.553,43.084 40.631,43.084 41.157,42.557 41.157,42.506 41.684,41.98 42.378,41.98 42.902,42.504 R34.1@43.399,42.504
  Mid-Layer 4 w0.152: v1(38.831,43.397) 38.866,43.432 38.866,43.904 38.631,44.139 37.639,44.139 37.17,43.67 37.109,43.67 36.738,43.298 36.298,43.298 34.901,41.901 34.901,41.017 33.431,39.547 33.431,37.601 35.356,35.676 35.356,29.782 35.277,29.704 35.277,23.733 34.955,23.411 34.955,21.026 35.648,20.333 35.648,18.854 35.767,18.735 35.767,16.798 35.5,16.531 35.5,10.447 35.856,10.091 37.119,10.091 37.407,9.803 39.204,9.803 v1(39.551,9.456)
AIP_D_N: D4.4 U11.28 | length 7.5
  Top Layer w0.152: U11.28@33.721,39.218 33.497,39.442 33.497,40.008 33.474,40.031 33.474,41.899 33.923,42.348 33.936,42.348 34.256,42.669 34.671,42.669 35.231,43.229 v1(35.231,44.5)
  Bottom Layer w0.152: D4.4@34.276,44.156 34.304,44.156 34.648,44.5 v1(35.231,44.5)
AIP_D_P: D4.6 U11.27 | length 5.2
  Top Layer w0.152: U11.27@32.821,39.218 33.045,39.442 33.045,40.008 33.068,40.031 33.068,42.068 33.755,42.755 33.767,42.755 34.088,43.075 v1(34.475,43.075)
  Bottom Layer w0.152: D4.6@34.394,43.156 D4.6@34.276,43.156 D4.6@34.394,43.156 ; D4.6@34.394,43.156 v1(34.475,43.075) D4.6@34.394,43.156
BAT: C11.1 JB1.1 JB2.1 U1.2 U1.3 | length 7.2
  Top Layer w0.508: C11.1@57.5,32.725 57.581,32.644 57.581,31.919 58.245,31.256 58.245,30.186 58.235,30.176 58.235,29.88 58.108,29.753 57.846,29.753 ; C11.1@57.575,32.725 58.215,33.365 58.541,33.365 59.108,32.798 JB1.1@59.241,32.798 59.243,32.795 59.243,31.325 JB2.1@59.245,31.323
BOOT0: R64.1 U3.C14 | length 3.5
  Bottom Layer w0.152: v1(36.947,16.947) 36.985,16.985 36.985,17.078 37,17.093 R64.1@36.831,17.263 36.831,17.284 36.991,17.444 37.246,17.444 39.091,17.444 39.635,17.988 v1(39.635,18.001)
BOOT1: B1_N.1 R31.1 RBT1.1 U3.C15 | length 26.5
  Top Layer w0.152: B1_N.1@36.5,20 36.853,19.647 v1@36.863,19.647 ; v1(36.5,37.5) 38.66,37.5 v1(39.134,37.974)
  Mid-Layer 2 w0.152: v1(36.863,19.609) 36.863,18.406 37.046,18.222 37.246,18.222 39.211,18.222 v1(39.549,18.56)
  Mid-Layer 4 w0.152: v1(36.5,37.5) 36.091,37.091 36.091,30.771 36.176,30.686 36.176,27.799 36.642,27.333 36.642,27.181 36.733,27.09 36.733,24.926 36.735,24.925 36.735,23.891 36.276,23.432 36.276,23.016 35.862,22.603 35.862,22.02 36.555,21.328 36.555,19.917 v1(36.863,19.609)
CAM1_C_N: J5.8 U3.K1 | length 7.2
  Top Layer w0.152: J5.8@39.75,5.95 39.797,5.997 39.797,6.686 40.069,6.958 40.234,6.958 40.299,7.023 40.977,7.023 41.272,6.728 v1(41.272,6.675)
  Mid-Layer 4 w0.152: v1(41.272,6.675) 41.31,6.713 41.31,6.885 41.408,6.983 41.772,6.983 42.099,7.311 42.099,8.086 42.514,8.5 43.59,9.576 43.895,9.576 44.014,9.458 v1(44.095,9.458)
CAM1_C_P: J5.9 U3.K2 | length 6.2
  Top Layer w0.152: J5.9@40.331,6.031 40.379,6.079 40.379,6.474 40.468,6.563 v1(40.468,6.617)
  Mid-Layer 4 w0.152: v1(40.468,6.617) 40.479,6.617 40.889,7.027 40.889,7.038 41.24,7.39 41.603,7.39 41.693,7.479 41.693,8.254 41.939,8.5 43.422,9.983 43.898,9.983 44.017,10.102 v1(44.097,10.102)
CAM1_D0_N: J5.2 U3.L2 | length 11.2
  Top Layer w0.152: J5.2@36.75,5.95 36.731,5.969 36.731,6.452 36.666,6.518 36.666,6.871 36.915,7.121 37.224,7.121 37.251,7.095 37.385,7.095 37.791,7.5 38.357,7.5 39.338,8.481 43.991,8.481 44.08,8.57 44.08,8.697 43.93,8.847 v1(43.93,8.886)
  Mid-Layer 4 w0.152: v1(43.93,8.886) 43.987,8.942 44.323,8.942 44.62,9.239 44.62,9.729 44.708,9.818 44.708,10.06 v1(44.746,10.098)
CAM1_D0_P: J5.3 U3.L1 | length 9.5
  Top Layer w0.152: J5.3@37.25,6.147 37.427,6.324 37.427,6.444 37.56,6.576 37.576,6.576 37.576,6.711 37.959,7.094 38.525,7.094 39.506,8.075 44.159,8.075 44.486,8.402 44.486,9.056 44.504,9.074 44.504,9.206 U3.L1@44.749,9.451
CAM1_D1_N: J5.5 U3.M2 | length 10.8
  Top Layer w0.152: J5.5@38.303,5.7 38.303,6.2 38.377,6.274 38.377,6.518 39.526,7.667 39.79,7.667 39.895,7.772 44.617,7.772 45.345,8.5 45.359,8.514 45.359,8.64 45.211,8.787 44.935,8.787 v1(44.905,8.817)
  Mid-Layer 4 w0.152: v1(44.905,8.817) 44.922,8.835 44.922,9.422 45,9.5 45,9.682 45.403,10.085 v1(45.403,10.098)
CAM1_D1_P: J5.6 U3.M1 | length 9.5
  Top Layer w0.152: J5.6@38.75,5.95 38.856,6.056 38.856,6.422 39.694,7.26 39.958,7.26 40.064,7.366 44.785,7.366 45.419,8 45.765,8.346 45.765,8.808 45.429,9.144 45.429,9.421 U3.M1@45.399,9.451
CAM1_GPIO: J5.18 U3.L13 | length 23
  Top Layer w0.152: J5.18@44.75,5.95 44.803,5.897 44.803,4.387 45.82,3.37 46.084,3.37 v1(46.122,3.332)
  Mid-Layer 4 w0.152: v1(44.676,17.197) 44.968,17.488 45.058,17.488 45.312,17.741 45.946,17.741 48.563,15.124 48.563,12.353 48.258,12.048 48.258,11.271 49.354,10.174 49.354,9.624 49.425,9.553 49.425,5.835 47.532,3.942 47.532,3.557 47.307,3.332 v1(46.122,3.332)
CAM1_SCL: J5.20 R17.1 U3.M16 | length 31.6
  Top Layer w0.152: J5.20@45.75,5.95 45.75,4.781 46.565,3.966 46.565,2.419 47.36,1.624 49.546,1.624 49.881,1.959 49.881,4.967 ; v1(49.753,5.604) 49.753,5.188 49.881,5.059 49.881,4.967 ; v1(52.437,5.138) 50.761,5.138 50.613,4.99 49.904,4.99 49.881,4.967
  Mid-Layer 4 w0.152: v1(45.404,19.197) 45.457,19.197 45.541,19.113 45.586,19.113 45.7,18.999 48.796,18.999 49.133,18.662 49.133,13.396 48.866,13.128 48.866,12.228 48.699,12.062 48.699,11.257 49.727,10.229 49.727,9.61 49.75,9.587 49.75,5.607 v1(49.753,5.604)
CAM1_SDA: J5.21 R18.1 U3.N16 | length 24.5
  Top Layer w0.152: J5.21@46.378,5.822 46.378,5.006 46.561,4.823 47.048,4.823 47.301,5.076 47.431,5.076 48.355,6 48.5,6 48.618,6.118 49.832,6.118 50.154,5.796 50.154,5.681 50.315,5.52 v1(50.315,5.466)
  Mid-Layer 4 w0.152: v1(46.045,19.401) 48.381,19.401 48.481,19.301 48.921,19.301 49.435,18.787 49.435,18.772 49.517,18.691 49.517,14.283 49.645,14.155 49.645,12.52 49.349,12.224 49.257,12.224 49.168,12.135 49.168,12.103 49.002,11.936 49.002,11.382 49.116,11.268 49.141,11.268 50.03,10.379 50.03,9.72 50.042,9.708 50.042,9.674 50.187,9.53 50.187,7.634 50.319,7.502 50.319,5.47 v1(50.315,5.466)
  Bottom Layer w0.152: v1(50.315,5.466) 50.396,5.466 50.476,5.386 50.875,5.386 51.029,5.232 R18.1@51.029,5.208
CAM2_C_N: J4.8 U3.P1 | length 8.8
  Top Layer w0.152: v1(46.608,8.879) 46.654,8.925 46.654,9.405 U3.P1@46.699,9.451
  Mid-Layer 4 w0.152: v1(43.311,4.583) 43.392,4.583 43.664,4.311 44.427,4.311 45.271,5.155 45.271,5.65 45.052,5.869 45.052,7.323 v1(46.608,8.879)
  Bottom Layer w0.152: J4.8@43.289,5.929 43.302,5.916 43.302,4.592 v1(43.311,4.583)
CAM2_C_P: J4.9 U3.P2 | length 11.1
  Mid-Layer 4 w0.152: v1(42.998,4.101) 43.055,4.044 43.356,4.044 43.495,3.905 44.596,3.905 45.678,4.987 45.678,5.818 45.458,6.037 45.458,7.155 47.014,8.71 47.014,9.101 46.699,9.415 v1(46.699,10.099)
  Bottom Layer w0.152: J4.9@42.793,5.907 42.793,4.387 42.998,4.182 v1(42.998,4.101)
CAM2_D0_N: J4.2 U3.R2 | length 7.2
  Mid-Layer 4 w0.152: v1(46.46,6.707) 46.46,6.745 46.698,6.983 47.012,6.983 48.029,8 48.594,8.565 48.594,10.079 48.168,10.505 47.748,10.505 v1(47.349,10.105)
  Bottom Layer w0.152: J4.2@46.293,5.643 46.355,5.705 46.355,6.521 46.46,6.626 v1(46.46,6.707)
CAM2_D0_P: J4.3 U3.T2 | length 5.7
  Mid-Layer 4 w0.152: v1(45.885,6.7) 45.885,6.744 46.53,7.389 46.844,7.389 47.455,8 48.188,8.733 48.188,9.91 v1(48,10.099)
  Bottom Layer w0.152: J4.3@45.795,5.643 45.852,5.699 45.84,5.711 45.84,6.655 v1(45.885,6.7)
CAM2_D1_N: J4.5 U3.N1 | length 4.4
  Mid-Layer 4 w0.152: v1(44.624,6.735) 44.567,6.792 44.567,6.947 44.541,6.973 44.541,7.308 44.533,7.316 44.533,7.685 44.841,7.993 45.222,7.993 45.23,8 45.607,8.377 45.994,8.765 45.994,9.402 v1(46.04,9.447)
  Bottom Layer w0.152: v1(44.624,6.735) 44.681,6.678 44.681,6.598 44.757,6.521 44.757,6.055 J4.5@44.794,6.018
CAM2_D1_P: J4.6 U3.N2 | length 5.6
  Mid-Layer 4 w0.152: v1(44.051,6.686) 44.108,6.743 44.108,6.898 44.134,6.925 44.134,7.14 44.127,7.148 44.127,7.853 44.672,8.399 45.054,8.399 45.2,8.545 ; 45.2,8.546 45.588,8.933 45.588,9.634 v1(46.047,10.094)
  Bottom Layer w0.152: v1(44.051,6.686) 44.089,6.649 44.089,6.467 44.17,6.386 44.17,6.267 44.22,6.217 44.22,5.716 J4.6@44.294,5.643
CAM2_GPIO: J4.18 U3.M13 | length 27.1
  Mid-Layer 4 w0.152: v1(39,3.92) 39,3.85 39.85,3 45,3 45.825,3.825 46.892,3.825 47.277,4.21 47.277,4.483 48.983,6.189 48.983,10.117 47.955,11.146 47.955,15.265 45.881,17.339 45.479,17.339 v1(45.478,17.34)
  Bottom Layer w0.152: J4.18@38.25,5.95 38.25,4.56 38.608,4.202 38.64,4.202 38.922,3.92 v1(39,3.92)
CAM2_SCL: J4.20 R14.1 U3.D3 | length 12.5
  Mid-Layer 2 w0.152: v1(37.082,6.704) 37.118,6.704 37.929,7.515 38.372,7.515 39.15,8.293 39.15,9.681 39.95,10.48 39.95,10.496 v1(40.197,10.743)
  Mid-Layer 4 w0.152: v1(32.171,4.581) 32.171,5.186 33.324,6.338 35.998,6.338 36.063,6.274 36.671,6.274 37.082,6.685 v1(37.082,6.704)
  Bottom Layer w0.152: v1(32.171,4.581) R14.1@32.171,4.592 ; v1(37.082,6.704) 37.082,6.651 37.22,6.513 37.22,6.217 J4.20@37.305,6.131 ; v1@40.183,10.743 v1(40.197,10.743)
CAM2_SDA: J4.21 R15.1 U3.C3 | length 11.2
  Mid-Layer 2 w0.152: v1(36.239,6.7) 37.565,8.026 37.565,8.367 37.698,8.5 38.835,9.636 38.835,10.03 39.445,10.64 v1(39.445,10.647)
  Mid-Layer 4 w0.152: v1(32.105,5.707) 32.185,5.707 32.353,5.875 32.415,5.875 33.24,6.7 v1(36.239,6.7)
  Bottom Layer w0.152: v1(36.239,6.7) 36.247,6.7 36.427,6.519 36.537,6.519 36.669,6.386 36.669,6.267 36.793,6.143 J4.21@36.793,5.643
DBG_D_N: D3.3 USBC2.A7 USBC2.B7 | length 6.7
  Top Layer w0.152: v1(29.404,18.849) 29.457,18.902 30.973,18.902 USBC2.B7@31.026,18.954 ; v1(29.86,18.101) 29.941,18.101 30.085,17.956 33.039,17.956 33.255,17.74 D3.3@33.854,17.74
  Mid-Layer 4 w0.152: v1(29.404,18.849) 29.803,18.45 29.803,18.158 v1(29.86,18.101)
DBG_D_P: D3.1 USBC2.A6 USBC2.B6 | length 7
  Top Layer w0.152: v1(29.314,18.281) 29.371,18.338 29.494,18.338 29.684,18.527 30.452,18.527 30.525,18.454 30.525,18.438 30.579,18.492 32.18,18.492 33.042,18.492 33.29,18.74 D3.1@33.854,18.74 ; v1(29.915,17.528) 29.951,17.492 30.99,17.492 USBC2.B6@31.026,17.456
  Mid-Layer 4 w0.152: v1(29.314,18.281) 29.371,18.224 29.371,17.987 29.684,17.675 29.688,17.675 29.835,17.528 v1(29.915,17.528)
DBG_RXD: R10.2 U2.8 U3.D1 | length 9.7
  Top Layer w0.152: v1(35.124,13.202) 35.141,13.185 35.141,12.785 35.036,12.679 35.036,10.314 34.86,10.138 34.86,9.751 35.219,9.391 36.251,9.391 36.731,8.911 36.826,8.911 37.082,8.911 37.395,8.599 37.666,8.599 38.064,8.996 39.736,8.996 39.75,9.01 39.762,9.01 U3.D1@40.2,9.448
DBG_TXD: R2.2 U2.9 U3.E3 | length 7
  Top Layer w0.152: U2.9@35.536,11.019 35.536,11.706 35.885,12.055 36.323,12.055 v1(36.345,12.077)
  Mid-Layer 4 w0.152: v1(36.345,12.077) 36.36,12.062 36.713,12.062 36.746,12.029 37.099,12.029 37.132,12.062 37.281,12.062 38.153,12.062 38.49,11.725 38.953,11.725 39.173,11.505 39.173,11.243 39.393,11.023 39.732,11.023 39.829,11.12 40.469,11.12 v1(40.842,10.746)
DBGP_D_N: D3.4 U2.2 | length 3.4
  Top Layer w0.152: D3.4@34.529,17.74 34.502,17.74 34.443,17.681 34.443,17.464 34.306,17.327 34.306,16.738 34.543,16.5 34.55,16.5 34.74,16.31 35.151,16.31 35.503,15.958 35.503,15.271 U2.2@35.536,15.238
DBGP_D_P: D3.6 U2.1 | length 5.1
  Top Layer w0.152: D3.6@34.529,18.74 34.588,18.681 34.879,18.681 35.173,18.388 35.173,18.025 34.927,17.78 34.927,17.521 34.608,17.202 34.608,16.869 34.843,16.634 35.366,16.634 35.973,16.027 35.973,16.006 36.036,15.943 U2.1@36.036,15.238
GND: ANT1.2 C1.2 C2.2 C3.2 C4.2 C5.1 C6.2 C7.2 C8.2 C9.1 C10.2 C11.2 C12.2 C13.2 C14.2 C15.2 C16.2 C17.2 C18.2 C19.2 C20.2 C23.2 C24.2 C25.2 C26.2 C27.2 C28.2 C29.2 C30.2 C31.2 C32.2 C33.1 C34.2 C35.1 C36.1 C37.2 C38.2 C39.2 C40.2 C41.2 C42.2 C43.2 C44.2 C45.2 C46.2 C47.2 C48.2 C49.2 C50.2 C51.2 C52.2 C53.2 C54.2 C55.2 C56.2 C57.2 C58.2 C59.2 C63.2 C65.2 C66.2 C67.2 C68.2 C69.2 C70.2 C71.2 C72.2 C73.2 C74.2 C75.2 C76.2 C77.2 C78.2 C79.2 C80.2 C81.2 C82.2 C84.2 C85.2 C86.2 C87.2 C88.2 C89.2 C90.2 C92.2 C93.2 C94.2 C95.1 C96.2 C98.2 C99.2 C100.2 C101.1 C102.2 C103.2 C104.2 C105.2 C106.2 C107.2 C109.1 C111.1 C112.2 CB1.2 CB2.2 CT1.2 D3.2 D4.2 D5.2 J4.1 J4.4 J4.7 J4.10 J4.13 J4.16 J4.19 J4.23 J4.24 J5.1 J5.4 J5.7 J5.10 J5.13 J5.16 J5.19 J5.23 J5.24 JB1.2 JB2.2 JT.2 PR1.3 Q2.2 Q4.2 R1.1 R3.2 R4.1 R5.2 R7.1 R9.1 R11.1 R19.1 R21.1 R24.1 R29.1 R31.2 R35.1 R37.1 R46.2 R48.2 R49.1 R55.1 R61.1 R62.2 R66.1 R67.2 R68.1 R69.1 R72.2 RB2.2 RB4.2 RB6.2 RD1.2 RD2.2 U1.4 U1.6 U1.8 U1.15 U1.17@56.1,29.75 U2.3 U3.A3 U3.B3 U3.B16 U3.C4 U3.C5 U3.C8 U3.C13 U3.D6 U3.D7 U3.D9 U3.D13 U3.E4 U3.E5 U3.E11 U3.E12 U3.E15 U3.E16 U3.F3 U3.F8 U3.F10 U3.F12 U3.G3 U3.G4 U3.G8 U3.G10 U3.G12 U3.G13 U3.G14 U3.G15 U3.G16 U3.H3 U3.H5 U3.H7 U3.H9 U3.H13 U3.H15 U3.J4 U3.J5 U3.J7 U3.J9 U3.J12 U3.J13 U3.J14 U3.J15 U3.K5 U3.K7 U3.K9 U3.K12 U3.K13 U3.K14 U3.K15 U3.K16 U3.L3 U3.L5 U3.L7 U3.L9 U3.L12 U3.L15 U3.M3 U3.M5 U3.M7 U3.M9 U3.M11 U3.M12 U3.N4 U3.N6 U3.N7 U3.N9 U3.N12 U3.P7 U3.P8 U3.P9 U3.P14 U3.R1 U3.T13 U5.2 U5.3 U5.8 U6.3 U6.4 U6.5 U7.3 U7.4 U7.5 U8.2 U8.3 U8.8 U10.2 U10.3 U10.8 U11.1 U11.3 U11.20 U11.31 U11.33 U11.36 U13.3 U14.3 U14.7@48,30 U15.3 U15.7@44.621,37.363 U16.4 U16.9 U17.5 USBC1.1 USBC1.2 USBC1.3 USBC1.4 USBC1.A1B12 USBC1.B1A12 USBC2.1 USBC2.2 USBC2.3 USBC2.4 USBC2.A1B12 USBC2.B1A12 Y2.2 Y2.4 | length 30.1
  Top Layer w0.152: U11.20@27.721,42.517 27.739,42.5 v1(28.741,42.5) ; USBC2.B1A12@31.627,15.004 v1@32.12,15.004 ; v1(33.709,18.24) D3.2@33.854,18.24 ; J5.1@36.378,5.822 36.304,5.748 36.304,4.715 36.548,4.472 v1(36.548,4.391) ; v1(37.455,4.642) 37.455,4.723 37.729,4.997 J5.4@37.729,5.827 ; CT1.2@38.171,53.163 38.837,53.163 39.336,52.664 ; J5.7@39.302,5.898 39.309,5.891 39.309,4.859 v1(39.314,4.854) ; v1(40.804,4.858) J5.10@40.803,5.868 ; v1(42.307,4.85) 42.306,4.852 42.306,5.886 J5.13@42.31,5.89 ; v1(42.798,17.249) U3.J13@43.448,17.249 ; v1(43.372,17.962) 43.435,17.899 43.448,17.899 U3.J13@43.448,17.249 ; J5.16@43.806,5.894 43.811,5.889 43.811,4.863 v1(43.817,4.857) ; v1(44.158,17.194) 44.103,17.249 U3.J13@43.448,17.249 ; v1(44.175,16.679) 44.098,16.602 44.098,16.601 43.448,16.601 U3.J13@43.448,17.249 ; J5.19@45.278,5.823 45.278,4.561 45.526,4.313 v1(45.526,4.232) ; v1(50.528,9.812) 50.528,9.893 50.601,9.966 50.601,10.159 50.761,10.319 R37.1@50.782,10.319 ; D5.2@50.589,20.43 50.624,20.465 50.965,20.465 v1(51,20.5) ; v1(55.344,31.665) 55.347,31.662 55.347,31.153 U1.8@55.35,31.15 ; v1(56.343,27.852) 56.347,27.855 56.347,28.347 U1.15@56.35,28.35
  Top Layer w0.254: 33.883,53.5 ANT1.2@33.883,54.167 ; 36.006,53.274 36.006,54.033 ANT1.2@36.14,54.167
  Top Layer w0.508: USBC2.A1B12@31.026,21.406 USBC2.4@31.026,22.301 ; 31.256,13.88 31.322,13.88 31.641,14.199 USBC2.B1A12@31.641,14.959 ; USBC2.B1A12@31.641,15.007 31.687,15.053 ; 31.687,15.005 v1@32.026,15.005
  Bottom Layer w0.152: v1(30.018,44.506) 30.075,44.563 30.256,44.563 PR1.3@30.838,45.146 ; R48.2@42.813,20.095 42.934,19.975 v1(43.258,19.975) ; v1(45.485,43.059) 45.515,43.03 46.07,43.03 U8.3@46.1,43 ; v1(45.49,42.483) 45.499,42.491 46.091,42.491 U8.2@46.1,42.5 ; U8.8@47.55,43 v1(48.5,43) ; v1(50.5,42.5) U10.2@51.1,42.5 ; v1(50.634,43.059) 50.664,43.03 51.07,43.03 U10.3@51.1,43 ; v1(51.488,36.541) 51.5,36.529 51.94,36.529 U5.3@51.953,36.516 ; U10.8@52.551,43.001 v1@53.828,43.001 ; U5.8@53.403,36.516 53.404,36.515 v1(54.335,36.513) v1(54.335,36.513)
  Bottom Layer w0.178: v1(42.148,15.3) 42.148,15.286 42.217,15.217 42.231,15.217 42.331,15.117 42.404,15.117 42.544,14.977 42.544,14.904 v1(42.798,14.65)